# Altium PCB PCB1.PcbDoc
Units mm, origin at the board's own origin, x right, y up, seen from the top; angles counter-clockwise.
Board outline 150 x 90 mm, 2 copper layers (Top Layer, Bottom Layer); 48 components, 33 nets, 146 pads, 26 vias.
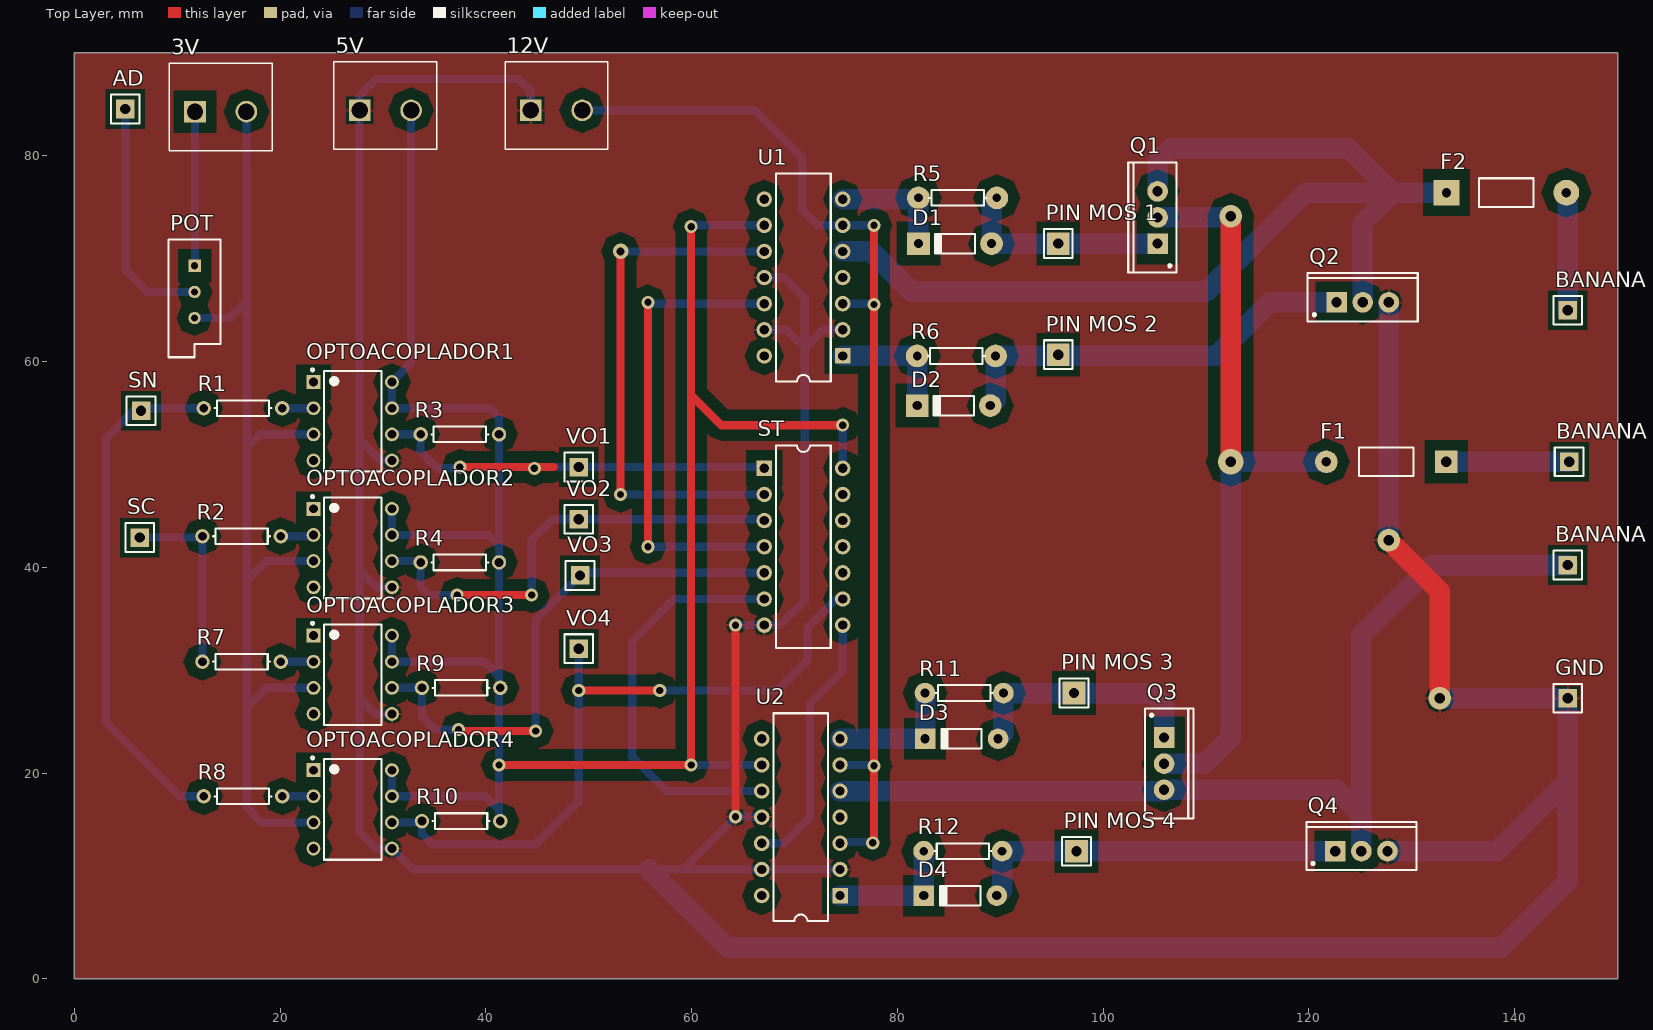
[diagram p0: Top Layer view]
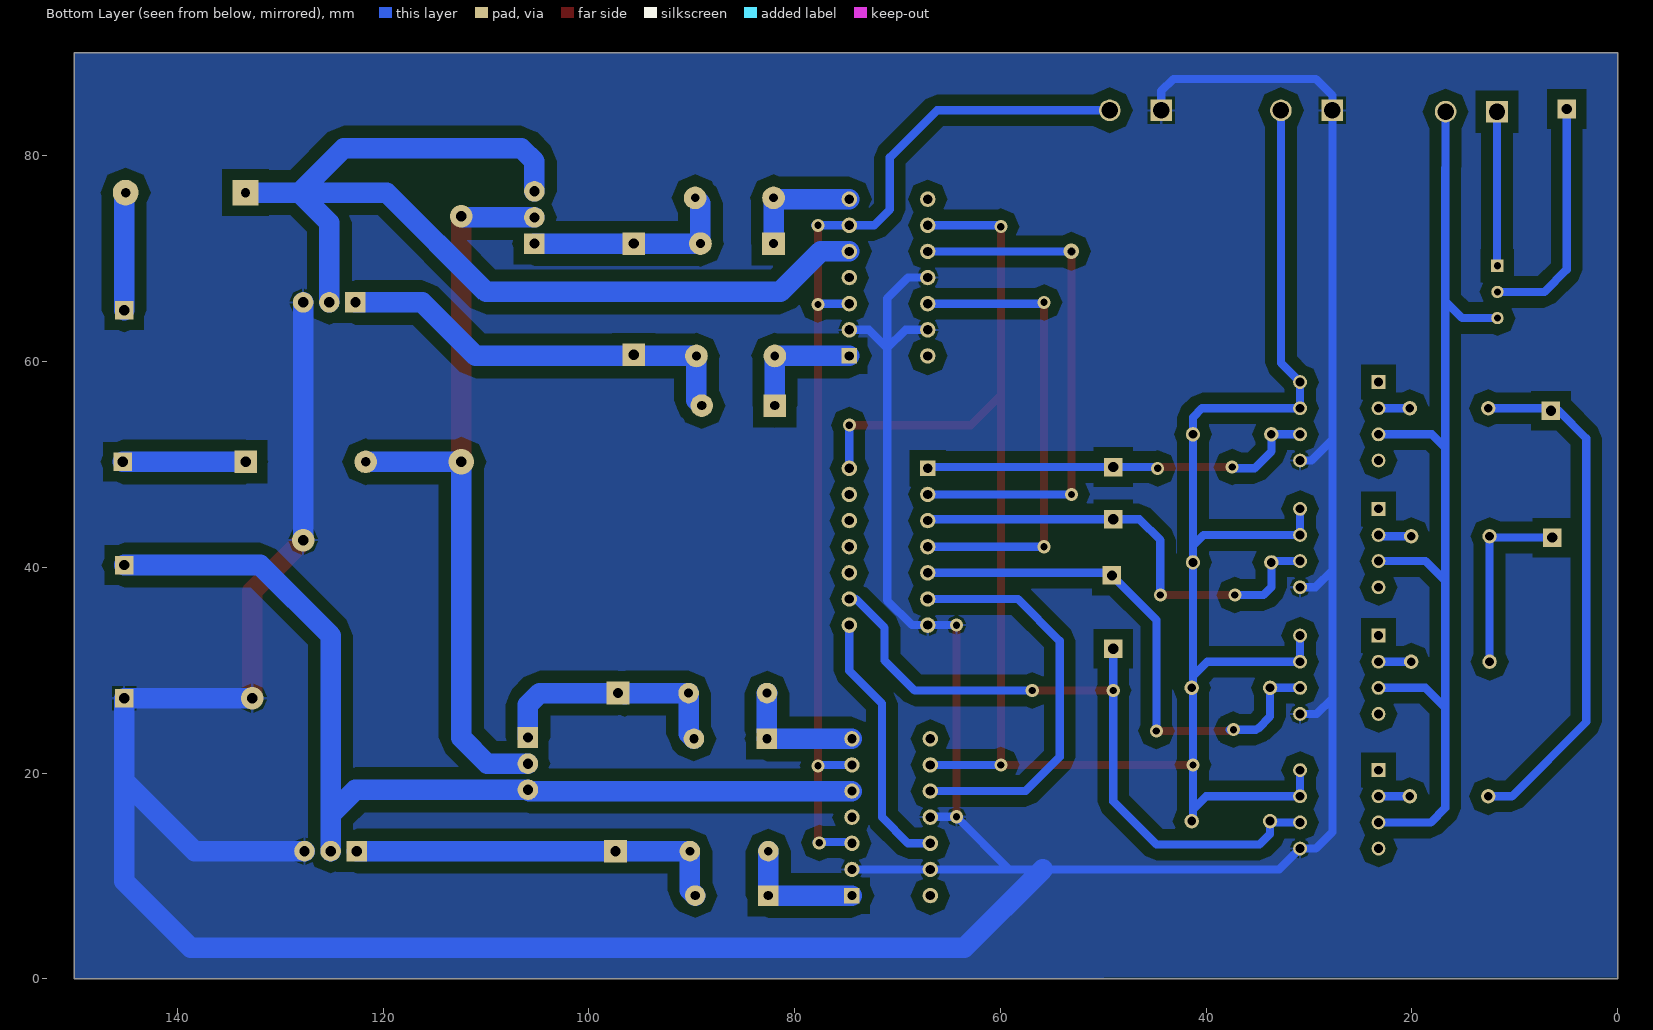
[diagram p1: Bottom Layer view, seen from below]

## Layer stack, top to bottom
Top Solder: solder mask 0.0102, Solder Resist, Dk 3.5
Top Layer: signal copper 0.0356
Dielectric 1: dielectric 0.32, FR-4, Dk 4.8
Bottom Layer: signal copper 0.0356
Bottom Solder: solder mask 0.0102, Solder Resist, Dk 3.5

## Board outline
0,0 150,0 150,90 0,90

## Design rules (kind name [scope] priority, off if disabled: settings)
Clearance MALLAC [InPolygon] p1: gap=1 ignorepadtopadclearanceinfootprint=FALSE
Clearance [All] p2: gap=0.254 ignorepadtopadclearanceinfootprint=FALSE except(0: Arc-Hole Track-Hole SMDPad-Hole THPad-Hole Via-Hole Fill-Hole Poly-Hole Region-Hole Text-Hole)
PolygonConnect [All] p1: connectstyle=Relief reliefconductorwidth=0.254 reliefentries=4 polygonreliefangle="90 Angle" airgapwidth=0.254
RoutingVias [All] p1: holewidth=0.711 width=1.27 viastyle="Through Hole" minholewidth=0.711 minwidth=1.27 maxholewidth=0.711 maxwidth=1.27
SolderMaskExpansion [All] p1: expansion=0.102
Width MALLAW [InPolygon] p1: maxlimit=0.254 minlimit=0.254 preferedwidth=0.254
Width [All] p2: maxlimit=3 minlimit=0.8 preferedwidth=0.8
30 further rules are at their usual default settings.

## Components (designator, comment, footprint, x,y, rotation, side; value= is the part's Value field where it differs from the comment)
3V "WE-Terminal Blocks Plugable Type 691311700002" 691311700002 14.224,84.285 r0 top
5V "WE-Terminal Blocks Plugable Type 691311700002" 691311700002 30.226,84.412 r0 top
12V "WE-Terminal Blocks Plugable Type 691311700002" 691311700002 46.863,84.412 r0 top
AD "Connector" "1x1x2.54 Pin Header TH V"#1 4.953,84.539 r0 top
BANANA1 "Connector" "1x1x2.54 Pin Header TH V"#1 145.288,50.249 r90 top
BANANA2 "Connector" "1x1x2.54 Pin Header TH V"#1 145.161,64.981 r90 top
BANANA3 "Connector" "1x1x2.54 Pin Header TH V"#1 145.161,40.216 r90 top
D1 "UF4004" DO-35#1 85.598,71.458 r180 top
D2 "UF4004" DO-35#1 85.471,55.71 r180 top
D3 "UF4004" DO-35#2 86.233,23.325 r180 top
D4 "UF4004" DO-35#2 86.106,8.085 r180 top
F1 "Fuse 1" PIN-W2/E2.8#1 127.508,50.249 r180 top
F2 "Fuse 1" PIN-W2/E2.8#2 139.192,76.411 r0 top
GND "Connector" "1x1x2.54 Pin Header TH V"#1 145.161,27.262 r0 top
OPTOACOPLADOR1 "6N137" *DIP762W50P254L977H451Q8 27.051,54.186 r0 top
OPTOACOPLADOR2 "6N137" *DIP762W50P254L977H451Q8 27.051,41.867 r0 top
OPTOACOPLADOR3 "6N137" *DIP762W50P254L977H451Q8 27.051,29.548 r0 top
OPTOACOPLADOR4 "6N137" *DIP762W50P254L977H451Q8 27.051,16.467 r0 top
"PIN MOS 1" "Connector" "1x1x2.54 Pin Header TH V"#2 95.631,71.458 r90 top
"PIN MOS 2" "Connector" "1x1x2.54 Pin Header TH V"#2 95.631,60.663 r90 top
"PIN MOS 3" "Connector" "1x1x2.54 Pin Header TH V"#2 97.155,27.77 r90 top
"PIN MOS 4" "Connector" "1x1x2.54 Pin Header TH V"#2 97.409,12.403 r90 top
POT "RPot" VR5 11.684,66.759 r270 top value=1K
Q1 "IRFZ48" TO-220AB 105.283,73.998 r90 top
Q2 "IRFZ48" TO-220AB 125.222,65.743 r0 top
Q3 "IRFZ48" TO-220AB 105.918,20.912 r270 top
Q4 "IRFZ48" TO-220AB 125.095,12.403 r0 top
R1 "Res1" AXIAL-0.3#1 16.383,55.456 r0 top value=10K
R2 "Res1" AXIAL-0.3#1 16.256,43.01 r0 top value=10K
R3 "Res1" AXIAL-0.3#1 37.465,52.916 r0 top value=10K
R4 "Res1" AXIAL-0.3#1 37.465,40.47 r0 top value=10K
R5 "Res1" AXIAL-0.3#2 85.852,75.903 r0 top value=10
R6 "Res1" AXIAL-0.3#2 85.725,60.536 r0 top value=10
R7 "Res1" AXIAL-0.3#1 16.256,30.818 r0 top value=10K
R8 "Res1" AXIAL-0.3#1 16.383,17.737 r0 top value=10K
R9 "Res1" AXIAL-0.3#1 37.592,28.278 r0 top value=10K
R10 "Res1" AXIAL-0.3#1 37.592,15.324 r0 top value=10K
R11 "Res1" AXIAL-0.3#3 86.487,27.77 r0 top value=10
R12 "Res1" AXIAL-0.3#3 86.36,12.403 r0 top value=10
SC "Connector" "1x1x2.54 Pin Header TH V"#1 6.35,42.883 r0 top
SN "Connector" "1x1x2.54 Pin Header TH V"#1 6.477,55.202 r0 top
ST "SN74LS14N" N014 70.866,41.994 r270 top
U1 "IR2110" PDIP14 70.866,68.156 r90 top
U2 "IR2110" PDIP14 70.612,15.705 r90 top
VO1 "Connector" "1x1x2.54 Pin Header TH V"#1 49.022,49.741 r0 top
VO2 "Connector" "1x1x2.54 Pin Header TH V"#1 49.022,44.661 r0 top
VO3 "Connector" "1x1x2.54 Pin Header TH V"#1 49.149,39.2 r0 top
VO4 "Connector" "1x1x2.54 Pin Header TH V"#1 49.022,32.088 r0 top

## Footprints (in the part's own frame and the unit in brackets; to place one, negate y for a bottom-side part, rotate by r counter-clockwise, add the part's x,y. Pads: shape width x height; smd on the part's side, far side on the other; paste and mask are expansions set on the pad)
"1x1x2.54 Pin Header TH V"#1 [mm] "1x1x2.54 Pin Header TH V"
  rect 1.8x1.8 hole 1: 1(0,0)
  silkscreen extent -1.4,-1.4 1.4,1.4, body extent -1.27,-1.27 1.27,1.27, height 8.55
"1x1x2.54 Pin Header TH V"#2 [mm] "1x1x2.54 Pin Header TH V"
  rect 2.2x2.2 hole 1: 1(0,0)
  silkscreen extent -1.4,-1.4 1.4,1.4, body extent -1.27,-1.27 1.27,1.27, height 8.55
691311700002 [mm] "5.00mm - Open Vertical PCB Header - 02p"
  rect 2.1x2.1 hole 1.6: 1(-2.5,0)
  round 2.1 hole 1.6: 2(2.5,0)
  silkscreen extent -5,-3.8 5,4.7, body extent -5,-3.8 5,4.7, height 12.01
*DIP762W50P254L977H451Q8 [mm]
  rect 1.35x1.35 hole 0.85: 1(-3.81,3.81)
  round 1.35 hole 0.85: 2(-3.81,1.27) 3(-3.81,-1.27) 4(-3.81,-3.81) 5(3.81,-3.81) 6(3.81,-1.27) 7(3.81,1.27) 8(3.81,3.81)
  silkscreen extent -4.04,-4.9 2.8,5.14
AXIAL-0.3#1 [mm] "Axial Device, Thru-Hole; 2 Leads; 0.3 in Pin Spacing"
  round 1.4 hole 0.85: 1(-3.81,0) 2(3.81,0)
  silkscreen extent -2.77,-0.76 2.77,0.76
AXIAL-0.3#2 [mm] "Axial Device, Thru-Hole; 2 Leads; 0.3 in Pin Spacing"
  round 2.2 hole 0.85: 1(-3.81,0) 2(3.81,0)
  silkscreen extent -2.77,-0.76 2.77,0.76
AXIAL-0.3#3 [mm] "Axial Device, Thru-Hole; 2 Leads; 0.3 in Pin Spacing"
  round 2 hole 0.85: 1(-3.81,0) 2(3.81,0)
  silkscreen extent -2.77,-0.76 2.77,0.76
DO-35#1 [mm] "Diode, Axial; Body 3.8 x 1.9 mm (LxDia. max), Lead Dia. 0.53 mm (max)"
  round 2.2 hole 0.9: 1(-3.55,0)
  rect 2.2x2.2 hole 0.9: 2(3.55,0)
  silkscreen extent -1.95,-0.95 2.05,0.95
DO-35#2 [mm] "Diode, Axial; Body 3.8 x 1.9 mm (LxDia. max), Lead Dia. 0.53 mm (max)"
  round 2 hole 0.9: 1(-3.55,0)
  rect 2x2 hole 0.9: 2(3.55,0)
  silkscreen extent -1.95,-0.95 2.05,0.95
N014 [mm] "DIP; 14 Leads; Row Spacing 7.62 mm; Pitch 2.54 mm"
  rect 1.5x1.5 hole 0.9: 1(-7.62,-3.81)
  round 1.5 hole 0.9: 2(-5.08,-3.81) 3(-2.54,-3.81) 4(0,-3.81) 5(2.54,-3.81) 6(5.08,-3.81) 7(7.62,-3.81) 8(7.62,3.81) 9(5.08,3.81) 10(2.54,3.81) 11(0,3.81) 12(-2.54,3.81) 13(-5.08,3.81) 14(-7.62,3.81)
  silkscreen extent -9.85,-2.65 9.85,2.65
PDIP14 [mm] "DIP; 14 Leads; Row Spacing 7.62 mm; Pitch 2.54 mm"
  rect 1.5x1.5 hole 0.9: 1(-7.62,-3.81)
  round 1.5 hole 0.9: 2(-5.08,-3.81) 3(-2.54,-3.81) 4(0,-3.81) 5(2.54,-3.81) 6(5.08,-3.81) 7(7.62,-3.81) 8(7.62,3.81) 9(5.08,3.81) 10(2.54,3.81) 11(0,3.81) 12(-2.54,3.81) 13(-5.08,3.81) 14(-7.62,3.81)
  silkscreen extent -10.1,-2.65 10.1,2.65
PIN-W2/E2.8#1 [mm] "Thru-Hole; 2 Leads"
  rect 2.2x2.2 hole 1: 1(-5.825,0)
  round 2.2 hole 0.9: 2(5.825,0)
  silkscreen extent -2.65,-1.4 2.65,1.4
PIN-W2/E2.8#2 [mm] "Thru-Hole; 2 Leads"
  rect 2.5x2.5 hole 0.9: 1(-5.825,0)
  round 2.5 hole 0.9: 2(5.825,0)
  silkscreen extent -2.65,-1.4 2.65,1.4
TO-220AB [mm] "TO, Thru-Hole, Vertical, Heatsink Mounted; 3 In-Line Leads; Pitch 2.54 mm"
  rect 2x2 hole 1: 1(-2.54,0)
  round 2 hole 1: 2(0,0) 3(2.54,0)
  silkscreen extent -5.35,-1.85 5.35,2.85, body extent -5.4,-1.9 5.4,2.9, height 19.3
VR5 [mm] "Thru-Hole; 3 Leads"
  rect 1.2x1.2 hole 0.7: 1(-2.54,0)
  round 1.2 hole 0.7: 2(0,0) 3(2.54,0)
  silkscreen extent -5.08,-2.54 6.35,2.54

## Part data
3V 5V 12V: "WR-TBL Terminal block - serie 3117 - 5.00mm", Manufacturer="Würth Elektronik eiSos GmbH", PartNo=691311700002, ComponentLink1 Description=Manufacturer, ComponentLink1URL=http://www.we-online.com, ComponentLink2 Description=Datasheet, ComponentLink2URL=http://katalog.we-online.de/em/datasheet/6913117000xx.pdf, Created by="Karrer Zheng", Created Date="6 January 2014", NoPins=02
AD BANANA1 BANANA2 BANANA3 GND "PIN MOS 1" "PIN MOS 2" "PIN MOS 3" "PIN MOS 4" SC SN VO1 VO2 VO3 VO4: library part "Header 1x1"
D1 D2 D3 D4: library part FDH333, "High Conductance Low Leakage Diode", Code_JEDEC=DO-204-AH, ComponentLink1Description="Manufacturer Link", ComponentLink1URL=http://www.fairchildsemi.com/, ComponentLink2Description=Datasheet, ComponentLink2URL=http://www.fairchildsemi.com/ds/FD/FDH333.pdf, DatasheetDocument=1997, LatestRevisionDate=17-Jul-2002, LatestRevisionNote="Re-released for DXP Platform.", PackageReference=DO-35, Published=8-Jun-2000, Publisher="Altium Limited"
F1 F2: "Fuse", LatestRevisionDate=17-Jul-2002, LatestRevisionNote="Re-released for DXP Platform.", PackageDescription="Thru-Hole; 2 Leads", PackageReference=PIN-W2/E2.8, Published=8-Jun-2000, Publisher="Altium Limited"
OPTOACOPLADOR1 OPTOACOPLADOR2 OPTOACOPLADOR3 OPTOACOPLADOR4: "High CMR, High Speed TTL Compatible Optocouplers", Package="DIP-8 Broadcom", Digi-Key_Part_Number=751-1262-5-ND, Digi-Key_Purchase_URL=https://www.digikey.ec/product-detail/en/vishay-semiconductor-opto-division/6N137/751-1262-5-ND/1731495?utm_source=snapeda&utm_medium=aggregator&utm_campaign=symbol, MF="Everlight Electronics", MP=6N137, SnapEDA_Link=https://www.snapeda.com/parts/6N137/Everlight%20Electronics%20Co%20Ltd/view-part/?ref=snap
POT: "Potentiometer", LatestRevisionDate=17-Jul-2002, LatestRevisionNote="Re-released for DXP Platform.", PackageDescription="Variable Resistor, Thru-Hole; 3 Leads", PackageReference=VR5, Published=8-Jun-2000, Publisher="Altium Limited", Set Position=0.5, Sim Note="Enter the Resistance value and the set point into parameter fields."
Q1 Q2 Q3 Q4: "HEXFET N-Channel Power MOSFET", ComponentLink1Description="Manufacturer Link", ComponentLink1URL=http://www.irf.com/, ComponentLink2Description=Datasheet, ComponentLink2URL=http://www.irf.com/product-info/datasheets/data/irfz48.pdf, DatasheetVersion=PD-9.758, LatestRevisionDate=17-Jul-2002, LatestRevisionNote="Re-released for DXP Platform.", Note="Pin 2 is electrically connected to pin 4.", PackageDescription="TO, Thru-Hole, Vertical, Heatsink Mounted; 3 In-Line Leads; Pitch 2.54 mm", PackageReference=TO-220AB, PackageVersion=Feb-1997, Published=8-Jun-2000, Publisher="Altium Limited"
R1 R2 R3 R4 R5 R6 R7 R8 R9 R10 R11 R12: "Resistor", LatestRevisionDate=17-Jul-2002, LatestRevisionNote="Re-released for DXP Platform.", PackageDescription="Axial Device, Thru-Hole; 2 Leads; 0.3 in Pin Spacing", PackageReference=AXIAL-0.3, Published=8-Jun-2000, Publisher="Altium Limited"
ST: "Hex Schmitt-Trigger Inverter", ComponentLink1Description="Manufacturer Link", ComponentLink1URL=http://www.ti.com/, ComponentLink2Description=Datasheet, ComponentLink2URL=http://www-s.ti.com/sc/ds/sn74ls14.pdf, DatasheetVersion=Mar-1988, LatestRevisionDate=04-Mar-2005, LatestRevisionNote="Stylized 3D Model Added.", PackageDescription="DIP; 14 Leads; Row Spacing 7.62 mm; Pitch 2.54 mm", PackageReference=N014, PackageVersion=Oct-1995, Published=8-Jun-2000, Publisher="Altium Limited"
U1 U2: "High and Low Side Driver", ComponentLink1Description="Manufacturer Link", ComponentLink1URL=http://www.irf.com/, ComponentLink2Description=Datasheet, ComponentLink2URL=http://www.irf.com/product-info/datasheets/data/ir2110.pdf, DatasheetVersion=PD60147J, LatestRevisionDate=04-Mar-2005, LatestRevisionNote="Stylized 3D Model Added.", Note="Pins 4, 8 and 14 are not connected", PackageDescription="DIP; 14 Leads; Row Spacing 7.62 mm; Pitch 2.54 mm", PackageReference=PDIP14, Published=8-Jun-2000, Publisher="Altium Limited"

## Via types
v1: diameter 1.27, hole 0.711, Top Layer to Bottom Layer, 21 vias
v2: diameter 2.2, hole 1, Top Layer to Bottom Layer, 3 vias
v3: diameter 2.5, hole 1, Top Layer to Bottom Layer, 1 vias
v4: diameter 1.5, hole 0.8, Top Layer to Bottom Layer, 1 vias

## Nets (pads, with @x,y where several pads share a name; then routed paths per layer and width w, separated by ;. In a path a pad name is that pad's centre, name@x,y a point inside that pad or via, vN(x,y) a via of type N, cw(c..) or ccw(c..) an arc to the next point about the centre after c; other vN are vias at no path point)
12V: 12V.2 U1.3 U1.6 U2.3 U2.6 | length 106.2
  Top Layer w0.8: v1(77.597,13.208) 77.767,13.208 77.724,13.251 v1(77.724,20.701) v1(77.724,65.532) v1(77.724,73.236)
  Bottom Layer w0.8: 12V.2 66.167,84.412 70.739,79.84 70.739,74.76 72.263,73.236 U1.6 v1(77.724,73.236) v1@77.978,73.236 ; U2.3@74.422,13.292 v1@77.851,13.292 ; U2.6 v1@77.851,20.785 ; U1.3 v1@77.597,65.616
FU1: F1.2 Q1.2 Q3.2 | length 74.3
  Top Layer w2: v3(112.395,50.249) v2(112.395,74.125)
  Bottom Layer w2: Q1.2 v2@112.141,73.998 ; Q3.2 109.855,20.912 112.395,23.452 v3(112.395,50.249) F1.2
GND: 5V.1 12V.1 GND.1 OPTOACOPLADOR1.5 OPTOACOPLADOR2.5 OPTOACOPLADOR3.5 OPTOACOPLADOR4.5 Q2.3 Q4.3 ST.7 U1.2 U1.11 U1.13 U2.2 U2.11 U2.13 | length 416.8
  Top Layer w0.8: v1(64.262,15.748) v1(64.262,34.374)
  Top Layer w2: v2(127.762,42.629) 132.715,37.676 v2(132.715,27.262)
  Bottom Layer w0.8: OPTOACOPLADOR3.5 29.25,25.738 27.726,27.262 ; OPTOACOPLADOR2.5 29.377,38.057 27.726,39.708 ; OPTOACOPLADOR1.5 29.758,50.376 27.726,52.408 ; 12V.1 44.363,86.277 43.18,87.46 29.337,87.46 27.726,85.849 5V.1 27.726,52.408 ; v1(64.262,34.374) ST.7 68.58,34.374 70.993,36.787 70.993,61.298 ; U2.11 66.759,15.748 v1(64.262,15.748) 59.139,10.625 ; U1.13 69.215,63.076 70.993,61.298 ; U1.11 68.961,68.156 70.993,66.124 70.993,61.298 ; U2.2 U2.13 59.139,10.625 ; U1.2 72.771,63.076 70.993,61.298 ; v2@127.635,42.502 v2(127.762,42.629) ; 27.726,27.262 27.726,39.708 ; 27.726,27.262 27.726,14.268 29.337,12.657 OPTOACOPLADOR4.5 32.893,10.625 55.88,10.625 59.139,10.625 ; 27.726,39.708 27.726,52.408
  Bottom Layer w2: 55.88,10.625 63.5,3.005 138.684,3.005 145.161,9.482 145.161,19.261 ; Q4.3 138.303,12.403 145.161,19.261 ; v2(127.762,42.629) Q2.3 ; v2(132.715,27.262) GND.1 145.161,19.261
HIN1: ST.2 U1.10 | length 51.6
  Top Layer w0.8: v1(53.086,47.074) v4(53.086,70.696)
  Bottom Layer w0.8: v1(53.086,47.074) ST.2 ; v4(53.086,70.696) U1.10
HIN2: ST.6 U2.10 | length 40
  Bottom Layer w0.8: U2.10@67.056,18.245 U2.10 57.531,18.245 54.229,21.547 54.229,32.85 58.293,36.914 ST.6
HO1: D1.2 R5.1 U1.7 | length 11.9
  Bottom Layer w2: U1.7 81.915,75.776 R5.1 82.042,71.464 D1.2
HO2: D3.2 R11.1 U2.7 | length 12.7
  Bottom Layer w0.8: D3.2 D3.2@82.683,24.087
  Bottom Layer w2: U2.7 D3.2 ; R11.1 82.683,27.764 D3.2@82.683,24.087
LIN1: ST.4 U1.12 | length 46.4
  Top Layer w0.8: v1(55.753,41.994) v1(55.753,65.743)
  Bottom Layer w0.8: v1(55.753,41.994) ST.4 ; v1(55.753,65.743) 55.88,65.616 U1.12
LIN2: ST.8 U2.12 | length 25.7
  Bottom Layer w0.8: U2.12 68.961,13.165 71.501,15.705 71.501,26.754 74.676,29.929 ST.8
LO1: D2.2 R6.1 U1.1 | length 12.1
  Bottom Layer w2: U1.1 R6.1 81.921,60.53 D2.2
LO2: D4.2 R12.1 U2.1 | length 12.5
  Bottom Layer w2: U2.1 D4.2 82.556,12.397 R12.1
MH1: "PIN MOS 1.1" D1.1 Q1.1 R5.2 | length 20.8
  Bottom Layer w2: R5.2 89.148,75.389 D1.1 95.631,71.458 Q1.1
MH2: "PIN MOS 3.1" D3.1 Q3.1 R11.2 | length 24.2
  Bottom Layer w0.8: 96.52,27.643 96.901,27.643 ; 98.552,27.643 98.807,27.767 98.813,27.77 ; Q3.1@105.791,23.325 Q3.1
  Bottom Layer w2: D3.1 90.297,23.839 R11.2 96.393,27.77 96.52,27.643 ; 97.162,27.77 98.813,27.77 104.775,27.77 105.918,26.627 Q3.1
ML1: "PIN MOS 2.1" D2.1 Q2.1 R6.2 | length 40.1
  Bottom Layer w2: D2.1 89.535,56.224 R6.2 ; R6.2@89.789,60.536 110.998,60.536 116.205,65.743 Q2.1
ML2: "PIN MOS 4.1" D4.1 Q4.1 R12.2 | length 36.9
  Bottom Layer w2: D4.1 90.17,8.599 R12.2 97.409,12.403 Q4.1
Net3V_1: 3V.1 POT.1 | length 15
  Bottom Layer w0.8: POT.1 11.724,69.339 3V.1
NetAD_1: AD.1 POT.2 | length 23.2
  Bottom Layer w0.8: AD.1 4.953,68.918 7.112,66.759 POT.2
NetBANANA1_1: BANANA1.1 F1.1 | length 12
  Bottom Layer w2: F1.1 BANANA1.1
NetBANANA2_1: BANANA2.1 F2.2 | length 11.5
  Bottom Layer w2: F2.2 145.161,76.267 BANANA2.1
NetOPTOACOPLADOR1_2: OPTOACOPLADOR1.2 R1.2 | length 3
  Bottom Layer w0.8: R1.2 OPTOACOPLADOR1.2
NetOPTOACOPLADOR2_2: OPTOACOPLADOR2.2 R2.2 | length 3.2
  Bottom Layer w0.8: R2.2 23.114,43.01 OPTOACOPLADOR2.2
NetOPTOACOPLADOR3_2: OPTOACOPLADOR3.2 R7.2 | length 3.2
  Bottom Layer w0.8: R7.2 OPTOACOPLADOR3.2
NetOPTOACOPLADOR4_2: OPTOACOPLADOR4.2 R8.2 | length 2.9
  Bottom Layer w0.8: R8.2@20.32,17.737 OPTOACOPLADOR4.2
P3O: 3V.2 OPTOACOPLADOR1.3 OPTOACOPLADOR2.3 OPTOACOPLADOR3.3 OPTOACOPLADOR4.3 POT.3 | length 102.1
  Bottom Layer w0.8: POT.3 15.113,64.219 16.764,65.87 ; 3V.2 16.724,78.864 16.764,78.824 16.764,65.87 ; OPTOACOPLADOR4.3 18.161,15.197 16.764,16.594 16.764,26.373 ; OPTOACOPLADOR3.3 18.669,28.278 16.764,26.373 ; OPTOACOPLADOR2.3 18.669,40.597 16.764,38.692 ; OPTOACOPLADOR1.3 18.034,52.916 16.764,51.646 ; 16.764,26.373 16.764,38.692 ; 16.764,38.692 16.764,51.646 ; 16.764,51.646 16.764,65.87
SC: R2.1 R7.1 SC.1 | length 18.3
  Bottom Layer w0.8: SC.1 12.319,42.883 R2.1 R7.1
SN: R1.1 R8.1 SN.1 | length 50.8
  Bottom Layer w0.8: R8.1 10.287,17.737 3.048,24.976 3.048,52.535 5.715,55.202 SN.1 6.731,55.456 R1.1
VCC: 5V.2 OPTOACOPLADOR1.7 OPTOACOPLADOR1.8 OPTOACOPLADOR2.7 OPTOACOPLADOR2.8 OPTOACOPLADOR3.7 OPTOACOPLADOR3.8 OPTOACOPLADOR4.7 OPTOACOPLADOR4.8 R3.2 R4.2 R9.2 R10.2 ST.14 U1.9 U2.9 | length 225.5
  Top Layer w0.8: v1(41.275,20.785) v1(59.944,20.785) 59.944,56.726 ; v1(59.944,73.109) 59.944,56.726 ; v1(74.676,53.805) 62.865,53.805 59.944,56.726
  Bottom Layer w0.8: OPTOACOPLADOR4.8 OPTOACOPLADOR4.7 40.005,17.737 41.275,16.467 ; OPTOACOPLADOR3.8 OPTOACOPLADOR3.7 39.878,30.818 41.275,29.421 ; OPTOACOPLADOR2.8 OPTOACOPLADOR2.7 40.259,43.137 41.275,42.121 ; 5V.2 32.726,59.861 OPTOACOPLADOR1.8 OPTOACOPLADOR1.7 40.386,55.456 41.275,54.567 R3.2 41.275,42.121 ; R10.2 41.275,15.451 41.275,16.467 ; v1(59.944,20.785) U2.9 ; v1(59.944,73.109) 60.071,73.236 U1.9 U1.9@66.929,73.109 ; ST.14 v1(74.676,53.805) ; 41.275,16.467 v1(41.275,20.785) 41.275,29.421 ; 41.275,29.421 R4.2 41.275,42.121
VO1: OPTOACOPLADOR1.6 R3.1 ST.1 VO1.1 | length 40.6
  Top Layer w0.8: v1(37.465,49.741) 46.609,49.741
  Bottom Layer w0.8: OPTOACOPLADOR1.6 R3.1 33.655,51.265 35.306,49.614 37.338,49.614 v1(37.465,49.741) ; v1(44.704,49.614) 44.831,49.741 VO1.1 66.929,49.741 ST.1
VO2: OPTOACOPLADOR2.6 R4.1 ST.3 VO2.1 | length 45.3
  Top Layer w0.8: v1(37.211,37.295) v1(44.45,37.295)
  Bottom Layer w0.8: OPTOACOPLADOR2.6 33.528,40.597 R4.1 33.655,38.057 34.417,37.295 v1(37.211,37.295) v1@37.338,37.295 ; v1(44.45,37.295) 44.45,42.629 46.482,44.661 VO2.1 66.929,44.661 ST.3
VO3: OPTOACOPLADOR3.6 R9.1 ST.5 VO3.1 | length 52.3
  Top Layer w0.8: v1(37.338,24.214) 37.465,24.087 v1(44.831,24.087)
  Bottom Layer w0.8: OPTOACOPLADOR3.6 R9.1 33.782,25.484 34.925,24.341 ; 35.179,24.214 v1(37.338,24.214) v1@37.719,24.214 ; v1(44.831,24.087) 44.831,34.882 VO3.1 49.403,39.454 ST.5
VO4: OPTOACOPLADOR4.6 R10.1 ST.9 VO4.1 | length 67.6
  Top Layer w0.8: v1(49.022,28.024) v1(56.896,28.024)
  Bottom Layer w0.8: OPTOACOPLADOR4.6 33.655,15.197 R10.1 33.782,14.054 34.798,13.038 44.831,13.038 49.022,17.229 v1(49.022,28.024) VO4.1@49.022,31.834 ; v1@56.769,28.024 v1(56.896,28.024) 68.326,28.024 71.247,30.945 71.247,34.12 74.041,36.914 ST.9
VS1: F2.1 Q1.3 Q2.2 U1.5 | length 104.3
  Bottom Layer w2: U1.5 77.47,70.696 81.407,66.759 109.982,66.759 119.634,76.411 128.143,76.411 ; Q1.3 105.283,79.459 106.553,80.729 123.825,80.729 128.143,76.411 ; Q2.2 125.222,73.49 128.143,76.411 ; F2.1 128.143,76.411
VS2: BANANA3.1 Q3.3 Q4.2 U2.5 | length 95.6
  Bottom Layer w2: U2.5 105.791,18.245 Q3.3 122.682,18.372 125.095,15.959 ; Q4.2 125.095,15.959 ; BANANA3.1 131.953,40.216 125.095,33.358 125.095,15.959
pads on no net: OPTOACOPLADOR1.1 OPTOACOPLADOR1.4 OPTOACOPLADOR2.1 OPTOACOPLADOR2.4 OPTOACOPLADOR3.1 OPTOACOPLADOR3.4 OPTOACOPLADOR4.1 OPTOACOPLADOR4.4 ST.10 ST.11 ST.12 ST.13 U1.4 U1.8 U1.14 U2.4 U2.8 U2.14

## Polygon pours and split planes (outlines as drawn)
GND on Bottom Layer "Bottom Layer-No Net" (solid, remove dead copper, pour order 8): 0,0.127 0,90.043 149.987,90.043 149.987,0
GND on Top Layer "Bottom Layer-No Net" (solid, remove dead copper, pour order 10): 0,0 0,90.043 149.987,90.043 149.987,0

## Silkscreen, mask and mechanical layers (free items; w line width, h text height)
Mechanical 1:
  the board outline again, w0.254